# EAGLE board minipov3 (EAGLE 5.07)
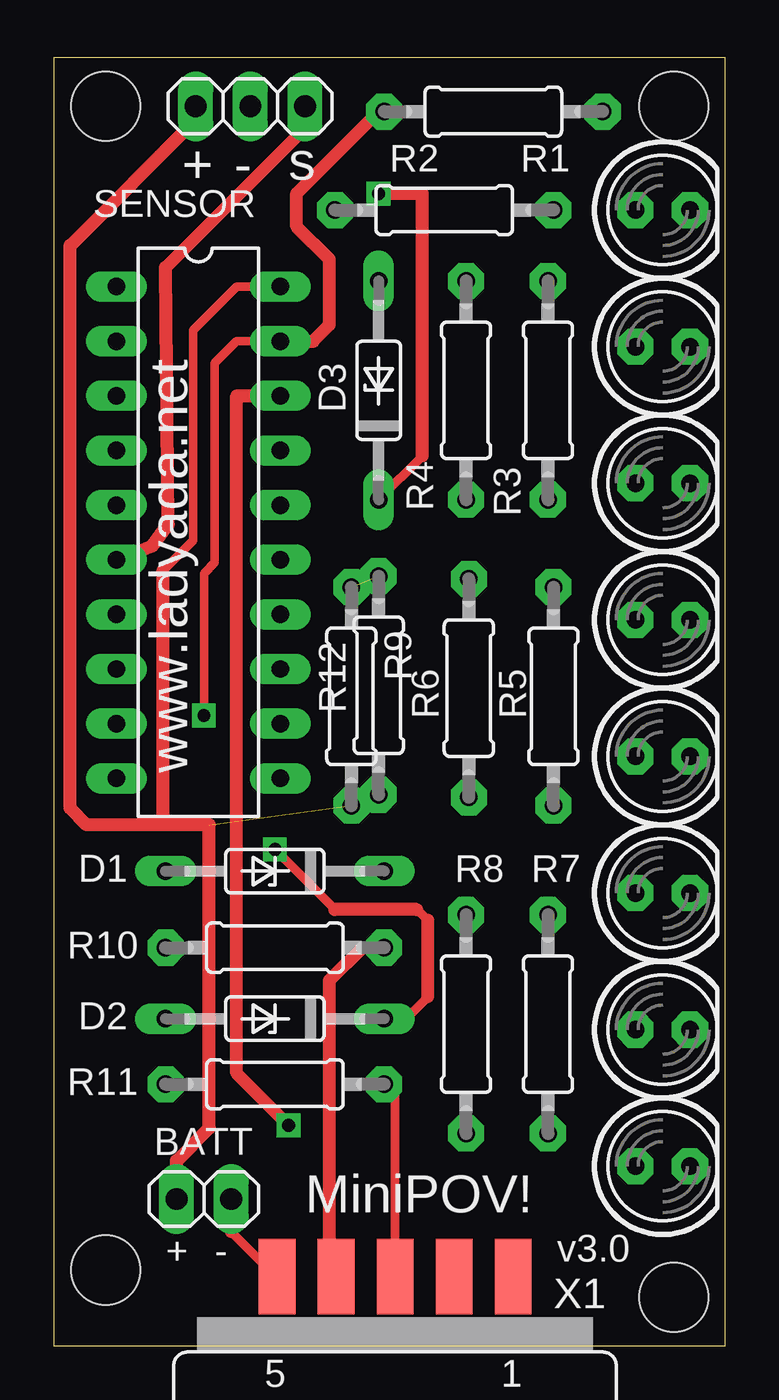
[diagram p0: board, top side]
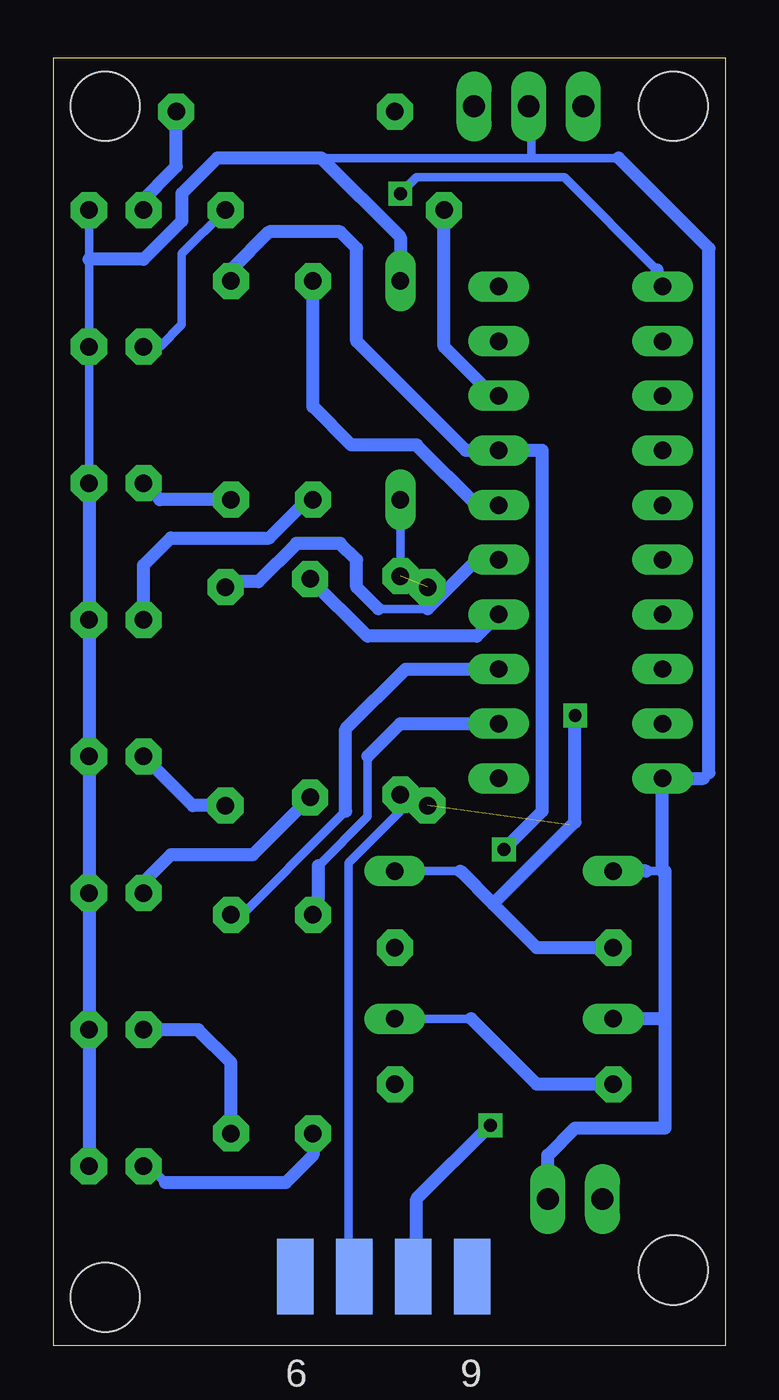
[diagram p1: board, bottom side, seen from below]

Size 31.22 x 59.87 mm. Coordinates in mm from the lower left corner, seen from the top.
Outline: 0,0 31.22,0 31.22,59.87 0,59.87 0,0
Copper layers (1*16): Top 0.035mm / dielectric 1.5mm / Bottom 0.035mm
Design rules "SparkFun": minimum track width 8mil, minimum drill 20mil, track to track 8mil, track to pad 8mil, pad to pad 8mil, via to via 8mil, smd to smd 8mil, copper to edge 10mil, drill to drill 8mil, minimum pad ring 12mil, minimum via ring 10mil, stop-mask expansion 4mil, vias tented up to drill 25mil, thermal gap 10mil
Holes 3.2 mm at 2.41,57.62 2.41,3.52 28.82,57.62 28.82,2.25

## Footprints (pad centres in the part's own frame; a part is rotated, then mirrored left to right if it is on the bottom)
DO35Z10 = drill 0.813 long: A 5.08,0; C -5.08,0
DIL20 = drill 0.813 long: 1 -11.43,-3.81; 2 -8.89,-3.81; 3 -6.35,-3.81; 4 -3.81,-3.81; 5 -1.27,-3.81; 6 1.27,-3.81; 7 3.81,-3.81; 8 6.35,-3.81; 9 8.89,-3.81; 10 11.43,-3.81; 11 11.43,3.81; 12 8.89,3.81; 13 6.35,3.81; 14 3.81,3.81; 15 1.27,3.81; 16 -1.27,3.81; 17 -3.81,3.81; 18 -6.35,3.81; 19 -8.89,3.81; 20 -11.43,3.81
1X02 = drill 1.016 long: 1 -1.27,0; 2 1.27,0
LED5MM = drill 0.813 pad 1.676 octagon: A -1.27,0; K 1.27,0
0207/10 = drill 0.813 pad 1.676 octagon: 1 -5.08,0; 2 5.08,0
1X03 = drill 1.016 long: 1 -2.54,0; 2 0,0; 3 2.54,0
F09D = smd 1.7 x 3.5: 1 -5.486,-6.045; 2 -2.743,-6.045; 3 0,-6.045; 4 2.743,-6.045; 5 5.486,-6.045 | smd 1.7 x 3.5 bottom: 6 -4.115,-6.045; 7 -1.372,-6.045; 8 1.372,-6.045; 9 4.115,-6.045

## Placement (x,y rotation side)
D1  3V  [DO35Z10]  10.28,15.2 180 top
D2  3V  [DO35Z10]  10.28,22.06 180 top
D3  3V  [DO35Z10]  15.11,44.41 90 top
IC1  TINY2313P  [DIL20]  6.73,37.81 270 top
JP1  [1X02]  6.98,6.82 0 top
LED1  [LED5MM]  28.32,8.34 0 top
LED2  [LED5MM]  28.32,14.69 0 top
LED3  [LED5MM]  28.32,21.04 0 top
LED4  [LED5MM]  28.32,27.39 0 top
LED5  [LED5MM]  28.32,33.74 0 top
LED6  [LED5MM]  28.32,40.09 0 top
LED7  [LED5MM]  28.32,46.44 0 top
LED8  [LED5MM]  28.32,52.79 0 top
R1  47  [0207/10]  20.44,57.37 180 top
R2  47  [0207/10]  18.16,52.79 180 top
R3  47  [0207/10]  22.98,44.41 90 top
R4  47  [0207/10]  19.17,44.41 90 top
R5  47  [0207/10]  23.24,30.19 90 top
R6  47  [0207/10]  19.3,30.57 90 top
R7  47  [0207/10]  22.98,14.95 90 top
R8  47  [0207/10]  19.17,14.95 90 top
R9  10k  [0207/10]  13.84,30.19 270 top
R10  4.7K  [0207/10]  10.28,18.5 0 top
R11  4.7K  [0207/10]  15.11,30.7 90 top
R12  4.7K  [0207/10]  10.28,12.15 0 top
SENSOR  [1X03]  9.14,57.62 0 top
X2  [F09D]  15.87,-2.83 180 top

## Library data of the parts
D1-D3 = diode
IC1 LED1-LED8 R1-R12 = minipov
JP1 SENSOR = pinhead
X2 = con-subd

## Nets
GND: D1.A D2.A D3.A IC1.10 JP1.2 LED1.K LED2.K LED3.K LED4.K LED5.K LED6.K LED7.K LED8.K SENSOR.2 X2.5
N$1: D3.C IC1.1 R9.1 R11.2
N$2: D1.C IC1.17 R3.2 R12.1
N$3: R12.2 X2.3
N$4: R11.1 X2.7
N$7: R10.2 X2.4
N$8: LED8.A R1.1
N$9: LED7.A R2.1
N$10: LED6.A R3.1
N$11: LED5.A R4.1
N$12: LED4.A R5.1
N$13: LED3.A R6.1
N$14: LED2.A R7.1
N$15: LED1.A R8.1
N$16: IC1.16 R4.2
N$17: IC1.15 R5.2
N$18: IC1.14 R6.2
N$19: IC1.13 R7.2
N$20: IC1.12 R8.2
N$21: IC1.6 SENSOR.3
N$22: D2.C IC1.19 R1.2 R10.1
R12: IC1.18 R2.2 X2.8
VCC: IC1.20 JP1.1 R9.2 SENSOR.1

## Tracks (layer width: path | path; a pad name or v marks a point on that pad's centre or on a via)
GND
  Top 0.406: X2.5 10.33,3.21 8.25,5.3
  Top 0.61: 8.25,5.3 JP1.2
  Bottom 0.406: LED8.K 29.59,50.51 LED7.K LED6.K | LED4.K 29.59,27.14 | LED1.K 29.59,8.09 | 3.68,22.06 2.92,22.06 2.79,22.06 | JP1.2 8.5,6.82 8.25,7.07 | 1.01,26.38 0.76,26.63 | 9.01,55.21 | SENSOR.2 9.01,57.62 9.01,55.21 | 4.96,55.21 9.01,55.21 | 9.01,55.21 18.66,55.21 18.79,55.21
  Bottom 0.61: LED6.K LED5.K LED4.K LED3.K LED2.K LED1.K | 2.92,22.06 IC1.10 1.01,26.38 | 2.79,15.2 2.79,22.06 | 3.68,22.06 D2.A | 2.79,15.2 D1.A | 2.79,15.2 2.79,10.12 6.98,10.12 8.25,8.85 8.25,7.07 | D3.A 15.11,51.52 18.79,55.21 23.62,55.21 25.27,53.56 25.27,52.29 27.05,50.51 29.59,50.51 | 0.76,26.63 0.76,51.02 4.96,55.21
N$1  (via drill 0.6)  (1 unrouted)
  Top 0.406: D3.C 17.14,41.36
  Top 0.61: 17.14,41.36 17.14,53.56 v15.11,53.56
  Bottom 0.406: R11.2 15.36,35.78 15.11,36.03 D3.C | v15.11,53.56 14.35,54.32 7.49,54.32 3.17,50
  Bottom 0.61: IC1.1 3.17,49.24 3.17,50
N$2  (via drill 0.6)
  Top 0.406: 13.08,20.28 v10.28,23.08 | 17.39,19.77 16.89,20.28 | 16.38,15.2 17.39,16.22
  Top 0.61: 16.89,20.28 13.08,20.28 | 17.39,16.22 17.39,19.77 | D1.C 16.38,15.2
  Bottom 0.406: D1.C 15.11,15.46 14.85,15.2 11.81,15.2 | 22.98,50 R3.2 | IC1.17 10.66,41.62 10.66,41.49
  Bottom 0.61: R12.1 8.76,12.15 11.81,15.2 | IC1.17 12.06,41.62 17.14,46.7 17.14,51.02 17.9,51.78 21.2,51.78 22.98,50 | v10.28,23.08 8.5,24.85 8.5,41.62 10.66,41.62
N$3
  Top 0.406: X2.3 15.87,11.65 R12.2
N$4
  Bottom 0.406: R11.1 15.11,24.85 17.52,22.44 17.52,3.44 17.27,3.44 17.27,3.21 | 17.27,3.21 17.27,3.14 | X2.7 17.27,3.21
N$7
  Top 0.406: 14.35,18.5 R10.2 | X2.4 | X2.4 12.82,3.52
  Top 0.61: 14.35,18.5 12.82,16.98 12.82,3.52
N$8
  Bottom 0.61: LED8.A 27.3,53.05 25.52,54.83 R1.1
N$9
  Bottom 0.406: R2.1 25.27,50.76 25.27,47.46 26.28,46.44 LED7.A
N$10
  Bottom 0.61: R3.1 26.28,39.33 LED6.A
N$11
  Bottom 0.406: 19.43,39.33 R4.1
  Bottom 0.61: 19.43,39.33 21.2,37.55 25.78,37.55 27.05,36.28 LED5.A
N$12
  Bottom 0.61: R5.1 24.76,25.11 LED4.A
N$13
  Bottom 0.406: 27.3,21.3 LED3.A
  Bottom 0.61: R6.1 21.97,22.82 25.78,22.82 27.3,21.3
N$14
  Bottom 0.61: R7.1 22.98,13.17 24.51,14.69 LED2.A
N$15
  Bottom 0.406: LED1.A 27.05,8.6 26.03,7.58
  Bottom 0.61: R8.1 19.17,8.85 20.44,7.58 26.03,7.58
N$16
  Bottom 0.61: IC1.16 11.55,39.08 14.35,41.87 17.39,41.87 19.17,43.65 R4.2
N$17
  Bottom 0.406: IC1.15 11.55,36.54 | 13.84,34.25 16.12,34.25
  Bottom 0.61: 11.55,36.54 13.84,34.25 | 16.12,34.25 17.14,35.27 17.14,36.54 17.9,37.3 19.93,37.3 21.71,35.52 22.98,35.52 R5.2
N$18
  Bottom 0.61: IC1.14 11.55,32.98 16.63,32.98 R6.2
N$19
  Bottom 0.406: R7.2 22.98,19.52 17.65,24.85
  Bottom 0.61: IC1.13 14.85,31.46 17.65,28.66 17.65,24.85
N$20
  Bottom 0.406: 16.63,27.39 16.63,24.6 18.92,22.31 | R8.2 18.92,20.03
  Bottom 0.61: IC1.12 15.11,28.92 16.63,27.39 | 18.92,20.03 18.92,22.31
N$21
  Top 0.406: 11.68,56.6 SENSOR.3 11.68,57.75 11.81,57.87
  Top 0.61: IC1.6 4.57,37.17 5.33,38.19 5.2,50.13 11.68,56.6
N$22  (via drill 0.6)
  Top 0.406: 15.11,57.37 R1.2 | IC1.19 8.5,46.7 7.49,45.68 7.49,36.41 6.98,35.9 v6.98,29.3
  Top 0.61: 15.11,57.37 11.3,53.56 11.3,52.03 12.82,50.51 12.82,47.46 12.06,46.7 IC1.19
  Bottom 0.406: 12.31,22.06 D2.C
  Bottom 0.61: R10.1 8.76,18.5 10.79,20.54 | 10.79,20.54 12.31,22.06 | v6.98,29.3 6.98,24.35 10.79,20.54
R12  (via drill 0.6)
  Top 0.61: v10.92,10.25 8.5,12.66 8.5,44.16 IC1.18
  Bottom 0.406: IC1.18 10.79,44.16 | X2.8 14.35,3.37
  Bottom 0.61: R2.2 13.08,46.44 10.79,44.16 | 14.35,3.37 14.35,6.82 v10.92,10.25
VCC  (1 unrouted)
  Top 0.406: 10.28,49.49 IC1.20 8.5,49.24 6.47,47.21 6.47,37.43 5.08,36.03 | 6.6,56.98 SENSOR.1
  Top 0.61: JP1.1 5.71,8.6 7.23,10.12 7.23,24.22 5.08,24.22 | 5.08,24.22 5.08,36.03 | 6.6,56.98 0.76,51.14 0.76,24.98 1.52,24.22 5.08,24.22

## Text on the board
tPlace: + | - | s | v3.0
tNames: R2 | R1 | D3 | R4 | R3 | R6 | R5 | R12 | www.ladyada.net | R8 | R7 | D1 | R10 | D2 | R11 | BATT | MiniPOV! | + | - | X1